# Altium PCB pure60-WKL.PcbDoc
Units mm, origin at the board's own origin, x right, y up, seen from the top; angles counter-clockwise.
Board outline 285.25 x 94.86 mm, 2 copper layers (Component Side, Bottom Layer), stack 1.571 mm thick; 141 components, 94 nets, 545 pads, 42 vias.
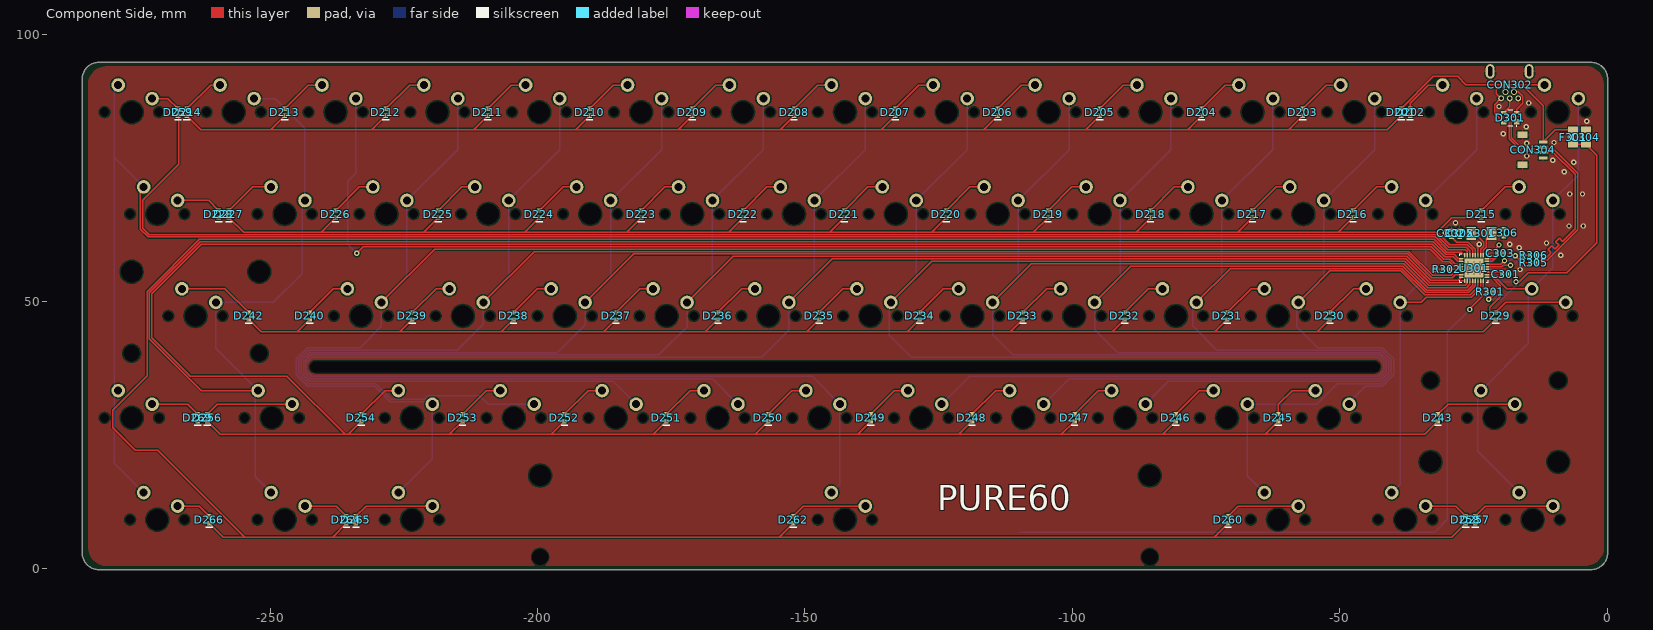
[diagram p0: Component Side view]
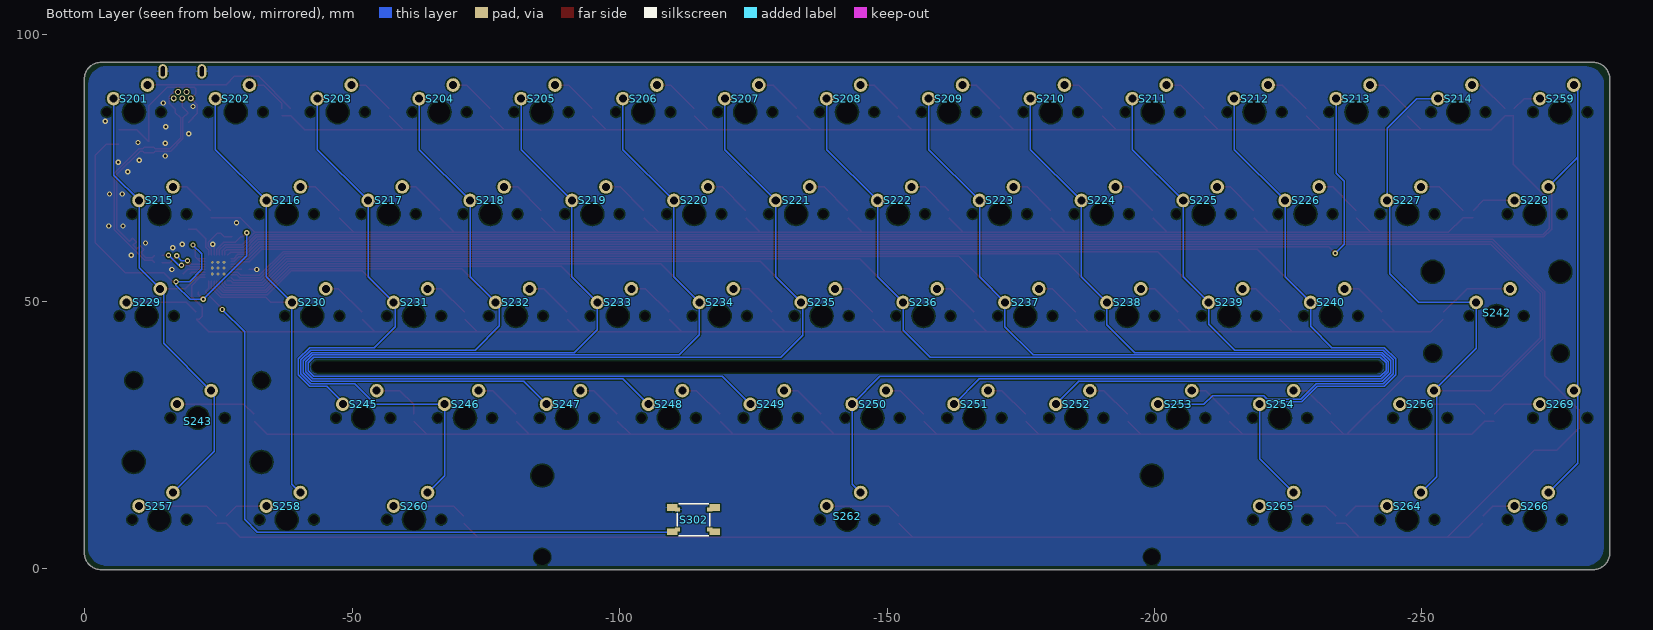
[diagram p1: Bottom Layer view, seen from below]
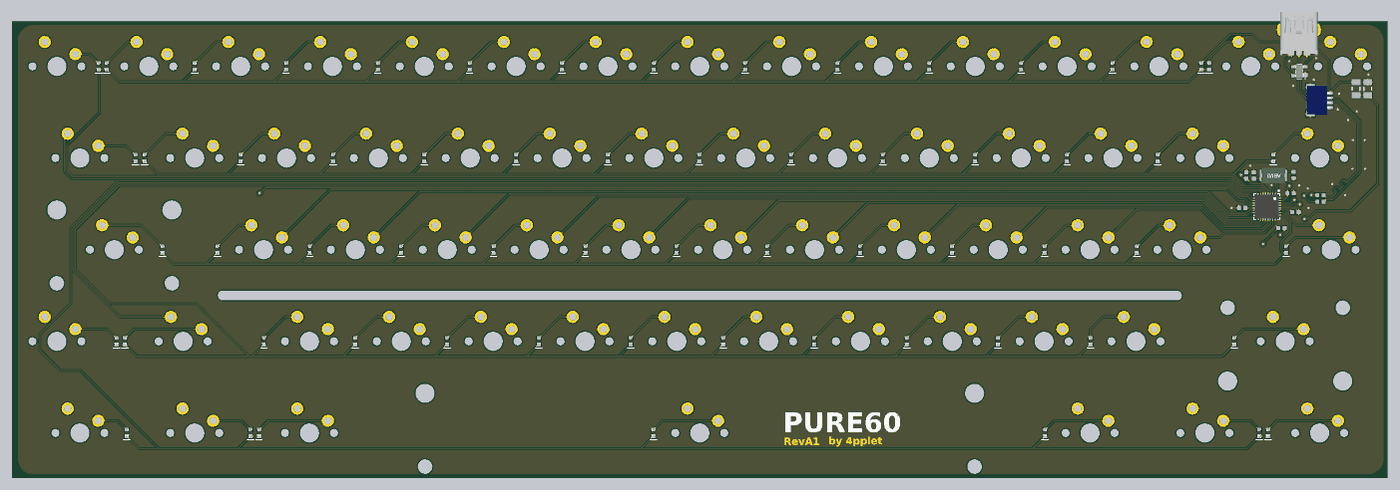
[diagram p2: 3D render of the assembled board from above, using the file's embedded part models]

## Layer stack, top to bottom
Top Solder: solder mask 0.0102, Solder Resist, Dk 3.5
Component Side: signal copper 0.0356
Dielectric 1: core 1.5, FR-4, Dk 4.2
Bottom Layer: signal copper 0.0356
Solder Side: solder mask 0.0102, Solder Resist, Dk 3.5

## Board outline
-285.127,3.01 -285.127,91.615 cw(c-282,91.615) -282,94.742 cw(c-282,94.615) -281.999,94.742 -195.49,94.742 -198.628,94.742 ccw(c-198.628,94.615) -198.629,94.742 -198.628,94.742 -3,94.742 cw(c-3,91.615) 0.127,91.615 0.127,3.01 cw(c-3,3.01) -3,-0.117 cw(c-3,0.01) -3.035,-0.112 -281.965,-0.112 cw(c-282,0.01) -282,-0.117 cw(c-282,3.01)

## Design rules (kind name [scope] priority, off if disabled: settings)
Clearance [All] p1: gap=0.2 ignorepadtopadclearanceinfootprint=FALSE except(0: Arc-Hole Track-Hole SMDPad-Hole THPad-Hole Via-Hole Fill-Hole Poly-Hole Region-Hole Text-Hole; 0.254: THPad-THPad THPad-Via THPad-Fill THPad-Poly THPad-Region THPad-Text Via-Via Via-Fill Via-Poly Via-Region Via-Text Fill-Fill Fill-Poly Fill-Region Fill-Text Poly-Poly Poly-Region Poly-Text Region-Region Region-Text Text-Text)
ComponentClearance [InComponent('No Component') And OnLayer('Component Side')] p1: gap=0.254 collisioncheckmode=3 verticalgap=0.254 showdistances=FALSE
DiffPairsRouting DiffPairsRouting_USB [InDifferentialPairClass('All Differential Pairs')] p1: maxlimit=0.254 minlimit=0.203 mostfreqgap=0.203 toplayer_minwidth=0.152 toplayer_maxwidth=0.381 toplayer_prefwidth=0.152 bottomlayer_minwidth=0.152 bottomlayer_maxwidth=0.381 bottomlayer_prefwidth=0.152 maxuncoupledlength=12.7
DiffPairsRouting [All] p2: maxlimit=0.254 minlimit=0.254 mostfreqgap=0.254 toplayer_minwidth=0.381 toplayer_maxwidth=0.381 toplayer_prefwidth=0.381 bottomlayer_minwidth=0.381 bottomlayer_maxwidth=0.381 bottomlayer_prefwidth=0.381 maxuncoupledlength=12.7
HoleSize [All] p1: absolutevalues=TRUE maxlimit=20 minlimit=0.025 maxpercent=80.000 minpercent=20.000
MatchedLengths MatchedLengths_USB_DiffPairs_1 [All] p1: tolerance=0.127 checknetsindiffpair=TRUE checkdiffpairvsdiffpair=FALSE checkxsignals=FALSE checkothers=FALSE
MatchedLengths MatchedLengths_USB_DiffPairs [All] p2: tolerance=0.127 checknetsindiffpair=TRUE checkdiffpairvsdiffpair=FALSE checkxsignals=FALSE checkothers=FALSE
PolygonConnect PolygonConnect_1 [All vs IsVia] p1: connectstyle=Direct reliefconductorwidth=0.254 reliefentries=4 polygonreliefangle="90 Angle" airgapwidth=0.254
PolygonConnect [All] p2: connectstyle=Relief reliefconductorwidth=0.254 reliefentries=4 polygonreliefangle="90 Angle" airgapwidth=0.254
RoutingVias [All] p1: holewidth=0.711 width=1.27 viastyle="Through Hole" minholewidth=0.711 minwidth=1.27 maxholewidth=0.711 maxwidth=1.27
SolderMaskExpansion [All] p1: expansion=0.102
Width [All] p1: maxlimit=0.254 minlimit=0.203 preferedwidth=0.254
27 further rules are at their usual default settings.

## Classes and differential pairs
component class Designator: C201 C202 C203 C204 C205 C206 D201 D202 D203 D204 D205 D206 D207 D208 D209 D210 D211 D212 D213 D214 D215 D216 D217 D218 D219 D220 D221 D222 D223 D224 D225 D226 D227 D228 D229 D230 D231 D232 D233 D234 D235 D236 D237 D238 D239 D240 D242 D243 D245 D246 D247 D248 D249 D250 D251 D252 D253 D254 D256 D257 D258 D259 D260 D262 D264 D265 D266 D268 D269 S201 S202 S203 S204 S205 S206 S207 S208 S209 S210 S211 S212 S213 S214 S215 S216 S217 S218 S219 S220 S221 S222 S223 S224 S225 S226 S227 S228 S229 S230 S231 S232 S233 S234 S235 S236 S237 S238 S239 S240 S242 S243 S245 S246 S247 S248 S249 S250 S251 S252 S253 S254 S256 S257 S258 S259 S260 S262 S264 S265 S266 S269
differential pair D: +D_P -D_N
differential pair D_PRE: +D_PRE_P -D_PRE_N

## Components (designator, comment, footprint, x,y, rotation, side; value= is the part's Value field where it differs from the comment)
C301 "" C0603[1608] -18.923,55.118 r180 top value=1uF
C302 "" C0603[1608] -29.083,62.738 r270 top value=0.1uF
C303 "" C0603[1608] -19.939,59.055 r180 top value=0.1uF
C304 "" C1206[3216] -3.937,80.772 r270 top value=4,7uF
C305 "" C0603[1608] -27.559,62.738 r270 top value=36pF
C306 "" C0603[1608] -19.304,62.865 r90 top value=36pF
CON302 "Molex 0565790519" "Molex 0565790519" -18.2,88 r270 top locked
CON304 "Header 5" "JST SM04B-SRSS-TB" -15.813,81.167 r270 top
D201 "Diode" D0603[1608] -38.481,85.415 r270 top
D202 "Diode" D0603[1608] -36.83,85.415 r270 top
D203 "Diode" D0603[1608] -56.896,85.415 r270 top
D204 "Diode" D0603[1608] -75.819,85.415 r270 top
D205 "Diode" D0603[1608] -94.869,85.415 r270 top
D206 "Diode" D0603[1608] -113.919,85.415 r270 top
D207 "Diode" D0603[1608] -133.096,85.415 r270 top
D208 "Diode" D0603[1608] -152.019,85.415 r270 top
D209 "Diode" D0603[1608] -171.069,85.415 r270 top
D210 "Diode" D0603[1608] -190.246,85.415 r270 top
D211 "Diode" D0603[1608] -209.296,85.415 r270 top
D212 "Diode" D0603[1608] -228.346,85.415 r270 top
D213 "Diode" D0603[1608] -247.269,85.415 r270 top
D214 "Diode" D0603[1608] -265.557,85.415 r270 top
D215 "Diode" D0603[1608] -23.495,66.365 r270 top
D216 "Diode" D0603[1608] -47.498,66.365 r270 top
D217 "Diode" D0603[1608] -66.294,66.365 r270 top
D218 "Diode" D0603[1608] -85.344,66.365 r270 top
D219 "Diode" D0603[1608] -104.521,66.365 r270 top
D220 "Diode" D0603[1608] -123.571,66.365 r270 top
D221 "Diode" D0603[1608] -142.621,66.365 r270 top
D222 "Diode" D0603[1608] -161.544,66.365 r270 top
D223 "Diode" D0603[1608] -180.594,66.365 r270 top
D224 "Diode" D0603[1608] -199.644,66.365 r270 top
D225 "Diode" D0603[1608] -218.567,66.365 r270 top
D226 "Diode" D0603[1608] -237.744,66.365 r270 top
D227 "Diode" D0603[1608] -257.683,66.365 r270 top
D228 "Diode" D0603[1608] -259.588,66.365 r270 top
D229 "Diode" D0603[1608] -20.828,47.315 r270 top
D230 "Diode" D0603[1608] -51.816,47.315 r270 top
D231 "Diode" D0603[1608] -70.993,47.315 r270 top
D232 "Diode" D0603[1608] -90.17,47.315 r270 top
D233 "Diode" D0603[1608] -109.22,47.315 r270 top
D234 "Diode" D0603[1608] -128.524,47.315 r270 top
D235 "Diode" D0603[1608] -147.32,47.315 r270 top
D236 "Diode" D0603[1608] -166.243,47.315 r270 top
D237 "Diode" D0603[1608] -185.293,47.315 r270 top
D238 "Diode" D0603[1608] -204.47,47.315 r270 top
D239 "Diode" D0603[1608] -223.393,47.315 r270 top
D240 "Diode" D0603[1608] -242.57,47.315 r270 top
D242 "Diode" D0603[1608] -254,47.315 r270 top
D243 "Diode" D0603[1608] -31.623,28.265 r270 top
D245 "Diode" D0603[1608] -61.468,28.265 r270 top
D246 "Diode" D0603[1608] -80.645,28.265 r270 top
D247 "Diode" D0603[1608] -99.568,28.265 r270 top
D248 "Diode" D0603[1608] -118.745,28.265 r270 top
D249 "Diode" D0603[1608] -137.668,28.265 r270 top
D250 "Diode" D0603[1608] -156.845,28.265 r270 top
D251 "Diode" D0603[1608] -175.895,28.265 r270 top
D252 "Diode" D0603[1608] -194.945,28.265 r270 top
D253 "Diode" D0603[1608] -213.995,28.265 r270 top
D254 "Diode" D0603[1608] -232.918,28.265 r270 top
D256 "Diode" D0603[1608] -261.747,28.265 r270 top
D257 "Diode" D0603[1608] -24.638,9.215 r270 top
D258 "Diode" D0603[1608] -26.416,9.215 r270 top
D259 "Diode" D0603[1608] -267.208,85.415 r270 top
D260 "Diode" D0603[1608] -70.866,9.215 r270 top
D262 "Diode" D0603[1608] -152.146,9.215 r270 top
D264 "Diode" D0603[1608] -235.712,9.215 r270 top
D265 "Diode" D0603[1608] -233.934,9.215 r270 top
D266 "Diode" D0603[1608] -261.366,9.215 r270 top
D269 "Diode" D0603[1608] -263.525,28.265 r270 top
D301 "PRTR5V0U2X" SOT190P237X120-4N -18.091,84.394 r180 top
F301 "Fuse Thermal" C1206[3216] -6.35,80.772 r90 top
R301 "Res1" R0603[1608] -21.829,51.816 r180 top value=10K
R302 "Res1" R0603[1608] -29.972,56.007 r180 top value=10K
R305 "Res1" R0603[1608] -13.716,57.277 r0 top value=22
R306 "Res1" R0603[1608] -13.731,58.674 r0 top value=22
S201 "MX" "MX-SWITCH - SWITCHED POL" -9.15,85.415 r180 bottom locked
S202 "MX" "MX-switch - switched pol" -28.2,85.415 r180 bottom locked
S203 "MX" "MX-SWITCH - SWITCHED POL" -47.25,85.415 r180 bottom locked
S204 "MX" "MX-switch - switched pol" -66.3,85.415 r180 bottom locked
S205 "MX" "MX-switch - switched pol" -85.35,85.415 r180 bottom locked
S206 "MX" "MX-switch - switched pol" -104.4,85.415 r180 bottom locked
S207 "MX" "MX-switch - switched pol" -123.45,85.415 r180 bottom locked
S208 "MX" "MX-switch - switched pol" -142.5,85.415 r180 bottom locked
S209 "MX" "MX-switch - switched pol" -161.55,85.415 r180 bottom locked
S210 "MX" "MX-switch - switched pol" -180.6,85.415 r180 bottom locked
S211 "MX" "MX-switch - switched pol" -199.65,85.415 r180 bottom locked
S212 "MX" "MX-switch - switched pol" -218.7,85.415 r180 bottom locked
S213 "MX" "MX-switch - switched pol" -237.75,85.415 r180 bottom locked
S214 "MX" "MX-switch - switched pol" -256.8,85.415 r180 bottom locked
S215 "MX" "MX-SWITCH - 1.5U - SWITCHED POL" -13.912,66.365 r180 bottom locked
S216 "MX" "MX-SWITCH - SWITCHED POL" -37.725,66.365 r180 bottom locked
S217 "MX" "MX-SWITCH - SWITCHED POL" -56.775,66.365 r180 bottom locked
S218 "MX" "MX-SWITCH - SWITCHED POL" -75.825,66.365 r180 bottom locked
S219 "MX" "MX-SWITCH - SWITCHED POL" -94.875,66.365 r180 bottom locked
S220 "MX" "MX-SWITCH - SWITCHED POL" -113.925,66.365 r180 bottom locked
S221 "MX" "MX-SWITCH - SWITCHED POL" -132.975,66.365 r180 bottom locked
S222 "MX" "MX-SWITCH - SWITCHED POL" -152.025,66.365 r180 bottom locked
S223 "MX" "MX-SWITCH - SWITCHED POL" -171.075,66.365 r180 bottom locked
S224 "MX" "MX-SWITCH - SWITCHED POL" -190.125,66.365 r180 bottom locked
S225 "MX" "MX-SWITCH - SWITCHED POL" -209.175,66.365 r180 bottom locked
S226 "MX" "MX-SWITCH - SWITCHED POL" -228.225,66.365 r180 bottom locked
S227 "MX" "MX-SWITCH - SWITCHED POL" -247.275,66.365 r180 bottom locked
S228 "MX" "MX-SWITCH - 1.5U" -271.087,66.365 r180 bottom locked
S229 "MX" "MX-switch - CAPS - stepped" -16.294,47.315 r180 bottom locked
S230 "MX" "MX-SWITCH - SWITCHED POL" -42.487,47.315 r180 bottom locked
S231 "MX" "MX-SWITCH - SWITCHED POL" -61.537,47.315 r180 bottom locked
S232 "MX" "MX-SWITCH - SWITCHED POL" -80.587,47.315 r180 bottom locked
S233 "MX" "MX-SWITCH - SWITCHED POL" -99.637,47.315 r180 bottom locked
S234 "MX" "MX-SWITCH - SWITCHED POL" -118.687,47.315 r180 bottom locked
S235 "MX" "MX-SWITCH - SWITCHED POL" -137.737,47.315 r180 bottom locked
S236 "MX" "MX-SWITCH - SWITCHED POL" -156.787,47.315 r180 bottom locked
S237 "MX" "MX-SWITCH - SWITCHED POL" -175.837,47.315 r180 bottom locked
S238 "MX" "MX-SWITCH - SWITCHED POL" -194.887,47.315 r180 bottom locked
S239 "MX" "MX-SWITCH - SWITCHED POL" -213.937,47.315 r180 bottom locked
S240 "MX" "MX-SWITCH - SWITCHED POL" -232.987,47.315 r180 bottom locked
S242 "MX" "MX-switch - Enter_ANSI" -263.95,47.315 r180 bottom locked
S243 "MX" "MX-switch - 2.25U" -21.056,28.265 r180 bottom locked
S245 "MX" "MX-SWITCH - SWITCHED POL" -52.012,28.265 r180 bottom locked
S246 "MX" "MX-SWITCH - SWITCHED POL" -71.062,28.265 r180 bottom locked
S247 "MX" "MX-SWITCH - SWITCHED POL" -90.112,28.265 r180 bottom locked
S248 "MX" "MX-SWITCH - SWITCHED POL" -109.162,28.265 r180 bottom locked
S249 "MX" "MX-SWITCH - SWITCHED POL" -128.212,28.265 r180 bottom locked
S250 "MX" "MX-SWITCH - SWITCHED POL" -147.262,28.265 r180 bottom locked
S251 "MX" "MX-SWITCH - SWITCHED POL" -166.312,28.265 r180 bottom locked
S252 "MX" "MX-SWITCH - SWITCHED POL" -185.362,28.265 r180 bottom locked
S253 "MX" "MX-SWITCH - SWITCHED POL" -204.412,28.265 r180 bottom locked
S254 "MX" "MX-SWITCH - SWITCHED POL" -223.462,28.265 r180 bottom locked
S256 "MX" "MX-switch - 1.75" -249.682,28.265 r180 bottom locked
S257 "MX" "MX-SWITCH - 1.5U" -13.912,9.215 r180 bottom locked
S258 "MX" MX-switch -37.719,9.215 r180 bottom
S259 "MX" MX-switch -275.85,85.415 r180 bottom locked
S260 "MX" "MX-SWITCH - 1.5U" -61.537,9.215 r180 bottom locked
S262 "MX" "MX-switch - 7u space" -142.499,9.215 r0 bottom locked
S264 "MX" MX-switch -247.269,9.215 r180 bottom
S265 "MX" "MX-SWITCH - 1.5U" -223.462,9.215 r180 bottom locked
S266 "MX" "MX-SWITCH - 1.5U" -271.087,9.215 r180 bottom locked
S269 "MX" MX-SWITCH -275.85,28.265 r180 bottom locked
S302 "SW-PB" "COMBO SWITCH" -113.792,9.215 r180 bottom
U301 "ATMEGA32U2" ATMEGA32U2-QFN -24.879,56.273 r270 top
X301 "XTAL" "CTS 445-series crystal" -23.495,62.738 r180 top

## Footprints (in the part's own frame and the unit in brackets; to place one, negate y for a bottom-side part, rotate by r counter-clockwise, add the part's x,y. Pads: shape width x height; smd on the part's side, far side on the other; paste and mask are expansions set on the pad)
ATMEGA32U2-QFN [mm] "QFN, 32-Leads, Body 5,00x5,00mm, Pitch 0,50mm, Thermal Pad 3,60x3,60mm, IPC Medium Density"
  oval 0.85x0.25 smd: 1(-2.4,1.75) 2(-2.4,1.25) 3(-2.4,0.75) 4(-2.4,0.25) 5(-2.4,-0.25) 6(-2.4,-0.75) 7(-2.4,-1.25) 8(-2.4,-1.75) 17(2.4,-1.75) 18(2.4,-1.25) 19(2.4,-0.75) 20(2.4,-0.25) 21(2.4,0.25) 22(2.4,0.75) 23(2.4,1.25) 24(2.4,1.75)
  oval 0.25x0.85 smd: 9(-1.75,-2.4) 10(-1.25,-2.4) 11(-0.75,-2.4) 12(-0.25,-2.4) 13(0.25,-2.4) 14(0.75,-2.4) 15(1.25,-2.4) 16(1.75,-2.4) 25(1.75,2.4) 26(1.25,2.4) 27(0.75,2.4) 28(0.25,2.4) 29(-0.25,2.4) 30(-0.75,2.4) 31(-1.25,2.4) 32(-1.75,2.4)
  rect 3.6x3.6 smd: 28(0,0)
  silkscreen extent -3.42,-2.65 2.65,2.65, body extent -2.51,-2.51 2.51,2.51, height 1
C0603[1608] [mm] "Chip Resistor, 2-Leads, Body 1,57x0,80mm, IPC Medium Density"
  rect 0.8x0.85 smd: 1(-0.65,0) 2(0.65,0)
  body extent -0.83,-0.43 0.82,0.43, height 0.5
C1206[3216] [mm]
  rect 1.2x1.8 smd: 1(-1.35,0) 2(1.35,0)
  silkscreen extent -0.35,-0.8 0.35,0.8, body extent -1.6,-0.9 1.6,0.9, height 1.2
"COMBO SWITCH" [mm] "Wurth Electronics Inc."
  rect 2x1.3 smd: 1(-3.975,2.25) 2(-3.975,-2.25) ""(3.975,-2.25) ""(3.975,2.25)
  rect 1x0.75 smd: 1(-3,1.875) 2(-3,-1.875) ""(3,-1.875) ""(3,1.875)
  round 1 on Mech16: ""(0,0)
  silkscreen extent -3,-3 3,3, body extent -4.5,-3.1 4.5,3.1, height 5
"CTS 445-series crystal" [mm]
  rect 1.8x2.4 smd: 1(-1.9,0) 2(1.9,0)
  body extent -2.5,-1.6 2.5,1.6, height 1.3
D0603[1608] [mm] "Chip Resistor, 2-Leads, Body 1,57x0,80mm, IPC Medium Density"
  rect 0.8x0.85 smd: 1(-0.65,0) 2(0.65,0)
  silkscreen extent 1.4,-0.63 1.4,0.64, body extent -0.8,-0.45 0.8,0.45, height 0.59
"JST SM04B-SRSS-TB" [mm]
  rect 0.6x1.55 smd: 1(1.3,3.875) 2(2.3,3.875) 3(3.3,3.875) 4(4.3,3.875)
  rect 1.2x1.8 smd: 5(0,0) 5(5.6,0)
  body extent -0.21,-0.76 5.79,4.19, height 3.25
"Molex 0565790519" [mm] "CONN RCPT USB2.0 MINI AB 5P R/A"
  round 1.1 hole 0.7: dn(-1.2,0.8) dp(0,0) gnd(0,1.6) id(-1.2,-0.8) vbus(0,-1.6)
  oval 2.7x1.7 hole 0.7 slot 1.9 at 0 deg: shield(-5.05,3.65) shield(-5.05,-3.65)
  body extent -8.75,-3.85 0.25,3.85, height 3.95
MX-switch [mm]
  round 2.54 hole 1.499 mask+0.102: 1(-3.81,2.54) 2(2.54,5.08)
  round 1 hole 1.702 unplated: ""(-5.08,0) ""(5.08,0)
  round 1 hole 3.988 unplated: ""(0,0)
MX-SWITCH [mm]
  round 2.54 hole 1.499 mask+0.102: 1(-3.81,2.54) 2(2.54,5.08)
  round 1 hole 1.702 unplated: ""(-5.08,0) ""(5.08,0)
  round 1 hole 3.988 unplated: ""(0,0)
"MX-SWITCH - 1.5U" [mm]
  round 2.54 hole 1.499 mask+0.102: 1(-3.81,2.54) 2(2.54,5.08)
  round 1 hole 1.702 unplated: ""(-5.08,0) ""(5.08,0)
  round 1 hole 3.988 unplated: ""(0,0)
  round 1 on Mech14: ""(0,0)
"MX-SWITCH - 1.5U - SWITCHED POL" [mm]
  round 2.54 hole 1.499 mask+0.102: 1(2.54,5.08) 2(-3.81,2.54)
  round 1 hole 1.702 unplated: ""(-5.08,0) ""(5.08,0)
  round 1 hole 3.988 unplated: ""(0,0)
  round 1 on Mech14: ""(0,0)
"MX-switch - 1.75" [mm]
  round 2.54 hole 1.499 mask+0.102: 1(-3.81,2.54) 2(2.54,5.08)
  round 1 hole 1.702 unplated: ""(-5.08,0) ""(5.08,0)
  round 1 hole 3.988 unplated: ""(0,0)
  round 1 on Mech14: ""(0,0)
"MX-switch - 2.25U" [mil]
  round 100 hole 59 mask+4: 1(-150,100) 2(100,200)
  round 60 hole 157.01 unplated: ""(-470,-325) ""(470,-325)
  round 60 hole 120 unplated: ""(-470,275) ""(470,275)
  round 39.37 hole 67.01 unplated: ""(-200,0) ""(200,0)
  round 39.37 hole 157.01 unplated: ""(0,0)
  round 39.37 on Mech14: ""(0,0)
"MX-switch - 7u space" [mm]
  round 2.54 hole 1.499 mask+0.102: 1(3.81,-2.54) 2(-2.54,-5.08)
  round 1.524 hole 3.988 unplated: ""(-57,-8.255) ""(57,-8.255)
  round 1.524 hole 3.048 unplated: ""(-57,6.985) ""(57,6.985)
  round 1 hole 1.702 unplated: ""(-5.08,0) ""(5.08,0)
  round 1 hole 3.988 unplated: ""(0,0)
  round 1 on Mech14: ""(0,0)
"MX-switch - CAPS - stepped" [mm]
  round 2.54 hole 1.499 mask+0.102: 1(-8.572,2.54) 2(-2.222,5.08)
  round 1 hole 1.702 unplated: ""(-9.842,0) ""(0.318,0)
  round 1 hole 3.988 unplated: ""(-4.763,0)
  round 1 on Mech14: ""(-4.763,0) ""(0,0)
"MX-switch - Enter_ANSI" [mil]
  round 100 hole 59 mask+4: 1(100,200) 2(-150,100)
  round 60 hole 120 unplated: ""(-470,-275) ""(470,-275)
  round 60 hole 157.01 unplated: ""(-470,325) ""(470,325)
  round 39.37 on Mech14: ""(-468.75,0) ""(-468.75,0) ""(0,0) ""(0,0)
  round 39.37 hole 67.01 unplated: ""(-200,0) ""(200,0)
  round 39.37 hole 157.01 unplated: ""(0,0)
"MX-SWITCH - SWITCHED POL" [mm]
  round 2.54 hole 1.499 mask+0.102: 1(2.54,5.08) 2(-3.81,2.54)
  round 1 hole 1.702 unplated: ""(-5.08,0) ""(5.08,0)
  round 1 hole 3.988 unplated: ""(0,0)
"MX-switch - switched pol" [mm]
  round 2.54 hole 1.499 mask+0.102: 1(2.54,5.08) 2(-3.81,2.54)
  round 1 hole 1.702 unplated: ""(-5.08,0) ""(5.08,0)
  round 1 hole 3.988 unplated: ""(0,0)
R0603[1608] [mm] "Chip Resistor, 2-Leads, Body 1,57x0,80mm, IPC Medium Density"
  rect 0.8x0.85 smd: 1(-0.65,0) 2(0.65,0)
  body extent -0.83,-0.43 0.82,0.43, height 0.5
SOT190P237X120-4N [mm] "SOT143, 4-Leads, Body 3,00x2,37mm, Pitch 1,90mm, IPC Medium Density"
  rect 1x1 smd: 1(-1.2,0.75)
  rect 1x0.6 smd: 2(-1.2,-0.95) 3(1.2,-0.95) 4(1.2,0.95)
  silkscreen extent -1.25,-1.5 0.7,1.6, body extent -1.25,-1.5 1.24,1.5, height 1.09

## Part data
C301: library part Cap, "Capacitor", LCSC MFG="Samsung Electro-Mechanics", LCSCPN=C15849, MFG=KEMET, MFGPN=C0603C104M5RACTU, MRF.Part=CL10A105KB8NNNC, Version="0603 imperial"
C302 C303: library part Cap, "Capacitor", LCSC MFG=YAGEO, LCSCPN=C14663, MFG=KEMET, MFGPN=C0603C104M5RACTU, MRF.Part=CC0603KRX7R9BB104, Version="0603 imperial"
C304: library part Cap, "Capacitor", LCSC MFG="Guangdong Fenghua Advanced Tech", LCSCPN=C29823, MFG=KEMET, MFGPN=C0603C104M5RACTU, MRF.Part=1206B475K500NT, Version="1206 imperial"
C305 C306: library part Cap, "Capacitor", LCSC MFG="Samsung Electro-Mechanics", LCSCPN=C159790, MFG=KEMET, MFGPN=C0603C104M5RACTU, MRF.Part=CL10C360JB8NNNC, Version="0603 imperial"
CON304: "JST for USB daughter board", LCSC MFG="JST Sales America", LCSCPN=C160404, MFG="JST Sales America Inc.", MFGPN=SM04B-SRSS-TB(LF)(SN), MRF.Part=SM04B-SRSS-TB(LF)(SN)
D201 D202 D203 D204 D205 D206 D207 D208 D209 D210 D211 D212 D213 D214 D215 D216 D217 D218 D219 D220 D221 D222 D223 D224 D225 D226 D227 D228 D229 D230 D231 D232 D233 D234 D235 D236 D237 D238 D239 D240 D242 D243 D245 D246 D247 D248 D249 D250 D251 D252 D253 D254 D256 D257 D258 D259 D260 D262 D264 D265 D266 D269: "Default Diode", LCSC MFG="Brightking Elec (TAIWAN)", LCSCPN=C109002, MFG="Bourns Inc.", MFGPN=CD0603-B0340R, MRF.Part=CD4148WTP, Version="0603 imperial"
D301: LCSC MFG="Brightking Elec (TAIWAN)", LCSCPN=C78442, MFG="Nexperia USA Inc.", MFGPN=PRTR5V0U2X,215, MRF.Part=UET14A05L03
F301: "Thermal Fuse", LCSC MFG="Shenzhen JDT Fuse", LCSCPN=C135338, MFG="Bel Fuse Inc.", MFGPN=0ZCJ0050FF2G, MRF.Part=ASMD1206-050
R301 R302: "Resistor", LCSC MFG="Uniroyal Elec", LCSCPN=C25804, MFG="Panasonic Electronic Components", MFGPN=ERJ-3EKF5101V, MRF.Part=0603WAF1002T5E, Version="0603 imperial"
R305 R306: "Resistor", LCSC MFG="Uniroyal Elec", LCSCPN=C23345, MFG="Panasonic Electronic Components", MFGPN=ERJ-3EKF5101V, MRF.Part=0603WAF220JT5E, Version="0603 imperial"
S201 S202 S203 S204 S205 S206 S207 S208 S209 S210 S211 S212 S213 S214 S216 S217 S218 S219 S220 S221 S222 S223 S224 S225 S226 S227 S228 S229 S230 S231 S232 S233 S234 S235 S236 S237 S238 S239 S240 S242 S243 S245 S246 S247 S248 S249 S250 S251 S252 S253 S254 S256 S257 S258 S259 S260 S262 S264 S265 S266 S269: library part SW-PB, "Switch"
S215: library part SW-PB, "TAB"
S302: "Switch", LCSC MFG="XKB Enterprise", LCSCPN=C318888, MFG=C&K, MFGPN="PTS645SM43SMTR92 LFS", MRF.Part=TS-1187A-C-D-B
U301: LCSC MFG="Microchip Tech", LCSCPN=C57345, MFG="Microchip Technology", MFGPN=ATMEGA32U2-AUR, MRF.Part=ATMEGA32U2-MU
X301: "Crystal Oscillator", LCSC MFG="Yangxing Tech", LCSCPN=C112572, MRF.Part=X503216MSB2GI

## Free pads (board coordinates)
  round 0 hole 2 slot 200 at 0 deg: ""(-142.5,37.79)

## Via types
v1: diameter 1, hole 0.5, Component Side to Bottom Layer, tented both sides, 33 vias
v2: diameter 0.5, hole 0.2, Component Side to Bottom Layer, tented bottom, 9 vias

## Nets (pads, with @x,y where several pads share a name; then routed paths per layer and width w, separated by ;. In a path a pad name is that pad's centre, name@x,y a point inside that pad or via, vN(x,y) a via of type N, cw(c..) or ccw(c..) an arc to the next point about the centre after c; other vN are vias at no path point)
col1: S201.2 S215.2 S229.2 S243.2 S257.2 U301.26 | length 94.1
  Component Side w0.254: U301.26 -21.361,55.023 -18.733,52.395 S229.2
  Bottom Layer w0.254: S257.2 -24.13,21.973 -24.13,32.811 S243.2 -23.551,33.345 -14.732,42.164 -14.732,51.734 S229.2 -10.102,56.364 S215.2 -5.34,73.668 S201.2
col2: S202.2 S216.2 S230.2 S258.2 U301.23 | length 97.7
  Component Side w0.254: S230.2 -34.727,49.855 -33.785,50.797 -25.396,50.797 -23.629,52.564 U301.23
  Bottom Layer w0.254: S258.2 -38.677,15.877 S230.2 -33.915,54.618 S216.2 -24.39,78.43 S202.2
col3: S203.2 S217.2 S231.2 S245.2 U301.22 | length 122.8
  Component Side w0.254: S231.2 -55.894,51.689 -55.88,51.689 -51.841,55.728 -38.541,55.728 -34.064,51.251 -25.584,51.251 -24.129,52.706 U301.22
  Bottom Layer w0.254: S245.2 -48.202,31.211 -45.22,34.193 -42.01,34.193 -39.903,36.3 -39.903,39.28 -42.01,41.387 -54.087,41.387 -58.039,45.339 -58.039,49.544 S231.2 -52.965,54.618 S217.2 -43.44,78.43 S203.2
col4: S204.2 S218.2 S232.2 S246.2 S260.2 U301.21 | length 196.2
  Component Side w0.254: S232.2 -70.45,56.182 -38.353,56.182 -33.876,51.705 -25.878,51.705 -24.629,52.954 U301.21
  Bottom Layer w0.254: S260.2 -67.252,17.47 S246.2 -54.285,30.805 -50.443,34.647 -42.198,34.647 -40.357,36.488 -40.357,39.092 -42.198,40.933 -72.937,40.933 -77.47,45.466 -77.47,49.163 S232.2 -72.015,54.618 S218.2 -62.49,78.43 S204.2
col5: S205.2 S219.2 S233.2 S247.2 U301.20 | length 233.2
  Component Side w0.254: S233.2 -89.046,56.636 -38.165,56.636 -33.688,52.159 -26.066,52.159 -25.129,53.096 U301.20
  Bottom Layer w0.254: S247.2 -82.006,35.101 -42.386,35.101 -40.811,36.676 -40.811,38.904 -42.386,40.479 -91.532,40.479 -95.827,44.775 S233.2 -91.065,54.618 S219.2 -81.54,78.43 S205.2
col6: S206.2 S220.2 S234.2 S248.2 U301.19 | length 289.3
  Component Side w0.254: S234.2 -107.642,57.09 -37.977,57.09 -33.5,52.613 -26.254,52.613 -25.629,53.238 U301.19
  Bottom Layer w0.254: S248.2 -100.602,35.555 -42.574,35.555 -41.265,36.864 -41.265,38.716 -42.574,40.025 -111.144,40.025 -114.877,43.759 S234.2 -110.115,54.618 S220.2 -100.59,78.43 S206.2
col7: S207.2 S221.2 S235.2 S249.2 U301.18 | length 345.1
  Component Side w0.254: S235.2 -126.238,57.544 -37.789,57.544 -33.312,53.067 -26.496,53.067 -26.129,53.434 U301.18
  Bottom Layer w0.254: S249.2 -119.198,36.009 -42.762,36.009 -41.719,37.052 -41.719,38.528 -42.762,39.571 -130.122,39.571 -134.239,43.688 -134.239,49.544 S235.2 -129.165,54.618 S221.2 -119.64,78.43 S207.2
col8: S208.2 S222.2 S236.2 S250.2 S262.2 U301.17 | length 394.9
  Component Side w0.254: S236.2 -144.834,57.998 -37.601,57.998 -33.124,53.521 -27.639,53.521 -27.287,53.873 U301.17
  Bottom Layer w0.254: S262.2 -143.452,15.882 S250.2 -148.656,36.009 -242.238,36.009 -243.281,37.052 -243.281,38.528 -242.238,39.571 -158.041,39.571 -152.977,44.635 S236.2 -148.215,54.618 S222.2 -138.69,78.43 S208.2
col9: S209.2 S223.2 S237.2 S251.2 U301.16 | length 359
  Component Side w0.254: S237.2 -163.43,58.452 -37.413,58.452 -32.936,53.975 -27.827,53.975 U301.16
  Bottom Layer w0.254: S251.2 -167.252,35.555 -242.426,35.555 -243.735,36.864 -243.735,38.716 -242.426,40.025 -177.272,40.025 -172.027,45.27 S237.2 -167.265,54.618 S223.2 -157.74,78.43 S209.2
col10: S210.2 S224.2 S238.2 S252.2 U301.15 | length 341.1
  Component Side w0.254: S238.2 -182.026,58.906 -37.225,58.906 -32.747,54.429 -28.971,54.429 -28.377,55.023 U301.15
  Bottom Layer w0.254: S252.2 -185.848,35.101 -242.614,35.101 -244.189,36.676 -244.189,38.904 -242.614,40.479 -196.249,40.479 -191.077,45.651 S238.2 -186.315,54.618 S224.2 -176.79,78.43 S210.2
col11: S211.2 S225.2 S239.2 S253.2 U301.14 | length 323.8
  Component Side w0.254: S239.2 -200.622,59.36 -37.036,59.36 -32.559,54.883 -29.159,54.883 -28.519,55.523 U301.14
  Bottom Layer w0.254: S253.2 -209.24,30.805 -210.837,32.402 -220.455,32.402 -221.109,31.748 -227.314,31.748 -230.213,34.647 -242.802,34.647 -244.643,36.488 -244.643,39.092 -242.802,40.933 -214.972,40.933 -210.127,45.778 S239.2 -205.365,54.618 S225.2 -195.84,78.43 S211.2
col12: S212.2 S226.2 S240.2 S254.2 S265.2 U301.12 | length 324.2
  Component Side w0.254: S240.2 -219.218,59.814 -33.066,59.814 -30.707,57.455 -29.483,57.455 -28.551,56.523 U301.12
  Bottom Layer w0.254: S265.2 -219.652,20.645 S254.2 -220.141,31.294 -227.502,31.294 -230.401,34.193 -242.99,34.193 -245.097,36.3 -245.097,39.28 -242.99,41.387 -238.648,41.387 -238.633,41.402 -233.172,41.402 -229.177,45.397 S240.2 -224.415,54.618 S226.2 -214.89,78.43 S212.2
col13: S213.2 U301.11 | length 238.6
  Component Side w0.254: v1(-233.807,59.055) -232.594,60.268 -32.878,60.268 -30.519,57.909 -29.295,57.909 -28.409,57.023 U301.11
  Bottom Layer w0.254: S213.2 -233.94,74.035 -235.458,72.517 -235.458,60.706 v1(-233.807,59.055)
col14: S214.2 S227.2 S242.2 S256.2 S264.2 U301.9 | length 381.3
  Component Side w0.254: S256.2 -262.834,33.345 -272.542,43.053 -272.542,51.689 -263.055,61.176 -32.502,61.176 -30.143,58.817 -28.584,58.817 -27.79,58.023 U301.9
  Bottom Layer w0.254: S214.2 -248.991,87.955 -243.465,82.429 S227.2 -243.967,68.403 -243.967,55.245 -249.357,49.855 S242.2 -260.14,41.263 S256.2 -252.73,32.837 -252.73,17.216 S264.2
col15: S228.2 S259.2 S266.2 S269.2 U301.7 | length 346
  Component Side w0.254: S228.2 -274.266,70.807 -274.266,63.566 -272.784,62.084 -32.126,62.084 -29.767,59.725 -26.472,59.725 -26.129,59.382 U301.7
  Bottom Layer w0.254: S259.2 -279.146,89.739 -279.146,76.964 ; S266.2 -279.146,19.814 -279.146,32.589 S269.2 -279.146,34.101 -279.146,76.964 ; S228.2 -279.146,76.964
D_N: CON302.dn CON304.2 D301.2 R305.2 | length 46.7
  Component Side w0.254: CON302.dn -16.56,89.2 -15.723,88.363 -15.723,87.123 -16.891,85.955 D301.2 -17.862,84.373 -17.862,80.6 -15.858,78.596 -13.111,78.596 -12.84,78.867 CON304.2 -11.036,78.867 -10.765,78.596 -10.098,78.596 -5.512,74.01 -5.512,63.438 -11.203,57.747 -12.596,57.747 R305.2
D_P: CON302.dp CON304.3 D301.3 R306.2 | length 46.7
  Component Side w0.254: CON302.dp -18.2,86.435 D301.3 -18.32,84.373 -18.32,80.411 -16.047,78.138 -13.111,78.138 -12.84,77.867 CON304.3 -11.036,77.867 -10.765,78.138 -10.287,78.138 -5.969,73.82 -5.969,63.627 -7.938,61.658 -8.275,61.321 -8.346,61.321 -8.875,61.851 -8.946,61.851 -9.585,61.212 -9.585,61.141 -9.056,60.611 -9.056,60.54 -9.695,59.901 -9.766,59.901 -10.295,60.431 -10.366,60.431 -11.005,59.792 -11.005,59.721 -10.476,59.191 -10.476,59.12 -10.795,58.801 -11.392,58.204 -12.611,58.204 R306.2
D_PRE_N: R305.1 U301.30 | length 9.3
  Component Side w0.254: U301.30 -21.927,57.023 -21.906,57.002 -19.833,57.002 v1(-19.177,57.658) ; v1(-17.145,58.547) -15.875,57.277 R305.1
  Bottom Layer w0.254: v1(-19.177,57.658) -18.034,57.658 v1(-17.145,58.547)
D_PRE_P: R306.1 U301.29 | length 8.8
  Component Side w0.254: U301.29 -21.927,56.523 -21.906,56.544 -19.644,56.544 -19.419,56.769 v1(-18.034,56.769) ; v1@-15.367,58.801 -15.24,58.674 R306.1
  Bottom Layer w0.254: v1(-18.034,56.769) -17.526,56.769 v1(-15.621,58.674)
GND: C301.1 C302.1 C303.1 C304.1 C305.1 C306.1 CON302.gnd CON302.shield CON304.4 CON304.5 D301.1 R302.2 S302.1 U301.3 U301.28 | length 8.2
  Component Side w0.254: v1(-32.131,56.007) R302.2 ; U301.3 -24.129,60.453 v1(-23.876,60.706) ; U301.28@-22.479,56.023 -19.178,56.023 C301.1
  other v1: -16.256,56.007 -8.636,58.674 -16.383,60.071 -18.161,60.706 -11.303,60.96 -7.112,64.135 -4.445,64.135 -28.321,64.77 -6.985,70.104 -4.572,70.104 -8.001,74.295 -6.223,76.073 -10.16,76.454 -14.986,77.216 -14.986,79.629 -9.906,79.756 -19.431,81.407 -15.113,82.677 -3.81,83.693 -20.193,86.487 -14.605,87.122
  other v2: -25.979,55.173 -24.879,55.173 -23.779,55.173 -25.979,56.273 -24.879,56.273 -23.779,56.273 -25.979,57.373 -24.879,57.373 -23.779,57.373
NetC301_2: C301.2 U301.27 | length 3.1
  Component Side w0.254: U301.27 -19.978,55.523 C301.2
NetC305_2: C305.2 U301.2 X301.2 | length 8.1
  Component Side w0.254: C305.2 -26.045,62.088 X301.2 -24.738,62.738 -23.049,61.049 -23.049,60.363 -23.629,59.783 U301.2
NetC306_2: C306.2 U301.1 X301.1 | length 7.3
  Component Side w0.254: U301.1 -23.129,59.641 -22.595,60.175 -22.595,61.738 X301.1 -20.818,63.515 C306.2
NetD201_1: D201.1 S201.1 | length 29.9
  Component Side w0.254: D201.1 -32.454,92.092 -27.957,92.092 -26.396,90.531 -11.726,90.531 S201.1
NetD202_1: D202.1 S202.1 | length 8.5
  Component Side w0.254: D202.1 -36.83,87.074 -33.409,90.495 S202.1
NetD203_1: D203.1 S203.1 | length 8.9
  Component Side w0.254: D203.1 -52.466,90.495 S203.1
NetD204_1: D204.1 S204.1 | length 8.8
  Component Side w0.254: D204.1 -71.389,90.495 S204.1
NetD205_1: D205.1 S205.1 | length 8.8
  Component Side w0.254: D205.1 -90.439,90.495 S205.1
NetD206_1: D206.1 S206.1 | length 8.8
  Component Side w0.254: D206.1 -109.489,90.495 S206.1
NetD207_1: D207.1 S207.1 | length 8.9
  Component Side w0.254: D207.1 -128.666,90.495 S207.1
NetD208_1: D208.1 S208.1 | length 8.8
  Component Side w0.254: D208.1 -147.589,90.495 S208.1
NetD209_1: D209.1 S209.1 | length 8.8
  Component Side w0.254: D209.1 -166.639,90.495 S209.1
NetD210_1: D210.1 S210.1 | length 8.9
  Component Side w0.254: D210.1 -185.816,90.495 S210.1
NetD211_1: D211.1 S211.1 | length 8.9
  Component Side w0.254: D211.1 -204.866,90.495 S211.1
NetD212_1: D212.1 S212.1 | length 8.9
  Component Side w0.254: D212.1 -223.916,90.495 S212.1
NetD213_1: D213.1 S213.1 | length 8.8
  Component Side w0.254: D213.1 -242.839,90.495 S213.1
NetD214_1: D214.1 S214.1 | length 8.1
  Component Side w0.254: D214.1 -261.127,90.495 S214.1
NetD215_1: D215.1 S215.1 | length 8.9
  Component Side w0.254: D215.1 -19.065,71.445 S215.1
NetD216_1: D216.1 S216.1 | length 9.1
  Component Side w0.254: D216.1 -43.068,71.445 S216.1
NetD217_1: D217.1 S217.1 | length 8.8
  Component Side w0.254: D217.1 -61.864,71.445 S217.1
NetD218_1: D218.1 S218.1 | length 8.8
  Component Side w0.254: D218.1 -80.914,71.445 S218.1
NetD219_1: D219.1 S219.1 | length 8.9
  Component Side w0.254: D219.1 -100.091,71.445 S219.1
NetD220_1: D220.1 S220.1 | length 9.7
  Component Side w0.254: D220.1 -119.141,71.445 S220.1 S220.1@-116.967,70.943
NetD221_1: D221.1 S221.1 | length 8.9
  Component Side w0.254: D221.1 -138.191,71.445 S221.1
NetD222_1: D222.1 S222.1 | length 8.8
  Component Side w0.254: D222.1 -157.114,71.445 S222.1
NetD223_1: D223.1 S223.1 | length 8.8
  Component Side w0.254: D223.1 -176.164,71.445 S223.1
NetD224_1: D224.1 S224.1 | length 8.8
  Component Side w0.254: D224.1 -195.214,71.445 S224.1
NetD225_1: D225.1 S225.1 | length 8.7
  Component Side w0.254: D225.1 -214.137,71.445 S225.1
NetD226_1: D226.1 S226.1 | length 8.8
  Component Side w0.254: D226.1 -233.314,71.445 S226.1
NetD227_1: D227.1 S227.1 | length 10.4
  Component Side w0.254: D227.1 -253.253,71.445 S227.1 S227.1@-250.317,70.943
NetD228_1: D228.1 S228.1 | length 8.5
  Component Side w0.254: S228.1 -261.478,68.905 D228.1
NetD229_1: D229.1 S229.1 | length 13.9
  Component Side w0.254: D229.1 -18.938,49.855 S229.1
NetD230_1: D230.1 S230.1 | length 8.6
  Component Side w0.254: D230.1 -47.386,52.395 S230.1
NetD231_1: D231.1 S231.1 | length 8.8
  Component Side w0.254: D231.1 -66.563,52.395 S231.1
NetD232_1: D232.1 S232.1 | length 8.9
  Component Side w0.254: D232.1 -85.74,52.395 S232.1
NetD233_1: D233.1 S233.1 | length 8.9
  Component Side w0.254: D233.1 -104.79,52.395 S233.1
NetD234_1: D234.1 S234.1 | length 9.9
  Component Side w0.254: D234.1 -124.094,52.395 S234.1
  Bottom Layer w0.254: S234.1@-121.793,51.83 S234.1
NetD235_1: D235.1 S235.1 | length 8.9
  Component Side w0.254: D235.1 -142.89,52.395 S235.1
NetD236_1: D236.1 S236.1 | length 8.8
  Component Side w0.254: D236.1 -161.813,52.395 S236.1
NetD237_1: D237.1 S237.1 | length 8.8
  Component Side w0.254: D237.1 -180.863,52.395 S237.1
NetD238_1: D238.1 S238.1 | length 8.9
  Component Side w0.254: D238.1 -200.04,52.395 S238.1
NetD239_1: D239.1 S239.1 | length 8.8
  Component Side w0.254: D239.1 -218.963,52.395 S239.1
NetD240_1: D240.1 S240.1 | length 8.9
  Component Side w0.254: D240.1 -238.14,52.395 S240.1
NetD242_1: D242.1 S242.1 | length 14.3
  Component Side w0.254: S242.1 -258.43,52.395 D242.1
NetD243_1: D243.1 S243.1 | length 15.2
  Component Side w0.254: D243.1 -29.733,30.805 S243.1
NetD245_1: D245.1 S245.1 | length 9.8
  Component Side w0.254: D245.1 -61.468,30.765 -58.888,33.345 S245.1
NetD246_1: D246.1 S246.1 | length 9.9
  Component Side w0.254: D246.1 -76.215,33.345 S246.1 S246.1@-74.295,32.652
NetD247_1: D247.1 S247.1 | length 8.8
  Component Side w0.254: D247.1 -95.138,33.345 S247.1
NetD248_1: D248.1 S248.1 | length 8.9
  Component Side w0.254: D248.1 -114.315,33.345 S248.1
NetD249_1: D249.1 S249.1 | length 8.8
  Component Side w0.254: D249.1 -133.238,33.345 S249.1
NetD250_1: D250.1 S250.1 | length 8.9
  Component Side w0.254: D250.1 -152.415,33.345 S250.1
NetD251_1: D251.1 S251.1 | length 8.9
  Component Side w0.254: D251.1 -171.465,33.345 S251.1
NetD252_1: D252.1 S252.1 | length 8.9
  Component Side w0.254: D252.1 -190.515,33.345 S252.1
NetD253_1: D253.1 S253.1 | length 8.9
  Component Side w0.254: D253.1 -209.565,33.345 S253.1
NetD254_1: D254.1 S254.1 | length 8.8
  Component Side w0.254: D254.1 -228.488,33.345 S254.1
NetD256_1: D256.1 S256.1 | length 16.7
  Component Side w0.254: D256.1 -259.857,30.805 S256.1
NetD257_1: D257.1 S257.1 | length 15.3
  Component Side w0.254: D257.1 -22.748,11.755 S257.1
NetD258_1: D258.1 S258.1 | length 8.3
  Component Side w0.254: S258.1 -28.306,11.755 D258.1
NetD259_1: D259.1 S259.1 | length 6.6
  Component Side w0.254: S259.1 -269.098,87.955 D259.1
  Bottom Layer w0.254: S259.1 S259.1@-271.349,88.646
NetD260_1: D260.1 S260.1 | length 13.9
  Component Side w0.254: D260.1 -68.976,11.755 S260.1
NetD262_1: D262.1 S262.1 | length 14.2
  Component Side w0.254: D262.1 -150.256,11.755 S262.1
NetD264_1: D264.1 S264.1 | length 8.5
  Component Side w0.254: S264.1 -237.602,11.755 D264.1
NetD265_1: D265.1 S265.1 | length 15.1
  Component Side w0.254: D265.1 -232.044,11.755 S265.1
NetD266_1: D266.1 S266.1 | length 6.7
  Component Side w0.254: S266.1 -263.256,11.755 D266.1
NetD269_1: D269.1 S269.1 | length 9.3
  Component Side w0.254: S269.1 -265.415,30.805 D269.1
NetR302_1: R302.1 U301.13 | length 2
  Component Side w0.254: R302.1 -29.306,56.023 U301.13
PC2: D215.2 D216.2 D217.2 D218.2 D219.2 D220.2 D221.2 D222.2 D223.2 D224.2 D225.2 D226.2 D227.2 D228.2 U301.5 | length 289.7
  Component Side w0.254: D228.2 D227.2 -254.96,62.992 -240.467,62.992 ; D226.2 -240.467,62.992 ; D225.2 -221.29,62.992 ; D224.2 -202.367,62.992 ; D223.2 -183.317,62.992 ; D222.2 -164.267,62.992 ; D221.2 -145.344,62.992 ; D220.2 -126.294,62.992 ; D219.2 -107.244,62.992 ; D218.2 -88.067,62.992 ; D217.2 -69.017,62.992 ; D216.2 -50.221,62.992 ; U301.5 -25.129,59.666 -26.096,60.633 -29.391,60.633 -31.75,62.992 ; D215.2 -29.027,65.715 -31.75,62.992 ; -240.467,62.992 -221.29,62.992 ; -221.29,62.992 -202.367,62.992 ; -202.367,62.992 -183.317,62.992 ; -183.317,62.992 -164.267,62.992 ; -164.267,62.992 -145.344,62.992 ; -145.344,62.992 -126.294,62.992 ; -126.294,62.992 -107.244,62.992 ; -107.244,62.992 -88.067,62.992 ; -88.067,62.992 -69.017,62.992 ; -69.017,62.992 -50.221,62.992 ; -50.221,62.992 -31.75,62.992
PC5: D229.2 D230.2 D231.2 D232.2 D233.2 D234.2 D235.2 D236.2 D237.2 D238.2 D239.2 D240.2 D242.2 U301.25 | length 282.7
  Component Side w0.254: D242.2 -251.658,44.323 -244.912,44.323 ; D240.2 -244.912,44.323 ; D239.2 -225.735,44.323 ; D238.2 -206.812,44.323 ; D237.2 -187.635,44.323 ; D236.2 -168.585,44.323 ; D235.2 -149.662,44.323 ; D234.2 -130.866,44.323 ; D233.2 -111.562,44.323 ; D232.2 -92.512,44.323 ; D231.2 -73.335,44.323 ; D230.2 -54.158,44.323 ; U301.25 -21.503,54.523 -19.939,52.959 -19.939,50.927 -21.971,48.895 -21.971,47.244 -21.392,46.665 D229.2 -23.17,44.323 -54.158,44.323 ; -244.912,44.323 -225.735,44.323 ; -225.735,44.323 -206.812,44.323 ; -206.812,44.323 -187.635,44.323 ; -187.635,44.323 -168.585,44.323 ; -168.585,44.323 -149.662,44.323 ; -149.662,44.323 -130.866,44.323 ; -130.866,44.323 -111.562,44.323 ; -111.562,44.323 -92.512,44.323 ; -92.512,44.323 -73.335,44.323 ; -73.335,44.323 -54.158,44.323
PD0: D201.2 D202.2 D203.2 D204.2 D205.2 D206.2 D207.2 D208.2 D209.2 D210.2 D211.2 D212.2 D213.2 D214.2 D259.2 U301.6 | length 547.6
  Component Side w0.254: D213.2 -249.865,82.169 ; D212.2 -230.942,82.169 ; D211.2 -211.892,82.169 ; D210.2 -192.842,82.169 ; D209.2 -173.665,82.169 ; D208.2 -154.615,82.169 ; D207.2 -135.692,82.169 ; D206.2 -116.515,82.169 ; D205.2 -97.465,82.169 ; D204.2 -78.415,82.169 ; D203.2 -59.492,82.169 ; D202.2 D201.2 -41.077,82.169 -59.492,82.169 ; U301.6 -25.629,59.524 -26.284,60.179 -29.579,60.179 -31.938,62.538 -272.596,62.538 -273.812,63.754 -273.812,68.961 -267.081,75.692 -267.081,84.638 D259.2 D214.2 -262.961,82.169 -249.865,82.169 ; -249.865,82.169 -230.942,82.169 ; -230.942,82.169 -211.892,82.169 ; -211.892,82.169 -192.842,82.169 ; -192.842,82.169 -173.665,82.169 ; -173.665,82.169 -154.615,82.169 ; -154.615,82.169 -135.692,82.169 ; -135.692,82.169 -116.515,82.169 ; -116.515,82.169 -97.465,82.169 ; -97.465,82.169 -78.415,82.169 ; -78.415,82.169 -59.492,82.169
PD2: D257.2 D258.2 D260.2 D262.2 D264.2 D265.2 D266.2 U301.8 | length 564.5
  Component Side w0.254: D266.2 -258.77,5.969 -254.762,5.969 ; D265.2 D264.2 -238.308,5.969 ; D262.2 -154.742,5.969 ; D260.2 -73.462,5.969 ; U301.8 -27.227,59.271 -29.955,59.271 -32.314,61.63 -263.243,61.63 -272.996,51.877 -272.996,36.122 -279.4,29.718 -279.4,26.416 -275.209,22.225 -271.018,22.225 -254.762,5.969 ; D257.2 D258.2 -29.012,5.969 -73.462,5.969 ; -254.762,5.969 -238.308,5.969 ; -238.308,5.969 -154.742,5.969 ; -154.742,5.969 -73.462,5.969
PD4: D243.2 D245.2 D246.2 D247.2 D248.2 D249.2 D250.2 D251.2 D252.2 D253.2 D254.2 D256.2 D269.2 U301.10 | length 570.7
  Component Side w0.254: D269.2 D256.2 -259.278,25.146 -235.966,25.146 ; D254.2 -235.387,25.146 ; D253.2 -216.464,25.146 ; D252.2 -197.414,25.146 ; D251.2 -178.364,25.146 ; D250.2 -159.314,25.146 ; D249.2 -140.137,25.146 ; D248.2 -121.214,25.146 ; D247.2 -102.037,25.146 ; D246.2 -83.114,25.146 ; D245.2 -63.937,25.146 ; D243.2 -34.092,25.146 -63.937,25.146 ; U301.10 -27.932,57.523 -28.772,58.363 -30.331,58.363 -32.69,60.722 -262.867,60.722 -272.088,51.501 -272.088,43.241 -264.915,36.068 -246.888,36.068 -235.966,25.146 ; -235.966,25.146 -235.387,25.146 ; -235.387,25.146 -216.464,25.146 ; -216.464,25.146 -197.414,25.146 ; -197.414,25.146 -178.364,25.146 ; -178.364,25.146 -159.314,25.146 ; -159.314,25.146 -140.137,25.146 ; -140.137,25.146 -121.214,25.146 ; -121.214,25.146 -102.037,25.146 ; -102.037,25.146 -83.114,25.146 ; -83.114,25.146 -63.937,25.146
RAW: CON302.vbus CON304.1 D301.4 F301.2 | length 31.6
  Component Side w0.254: D301.4 -21.02,85.173 -21.02,86.83 -19.85,88 CON302.vbus -20.701,88.901 -20.701,89.789 -20.413,90.077 -15.401,90.077 -11.938,86.614 CON304.1 -9.683,82.122 F301.2
RST: R301.2 S302.2 U301.24 | length 129.1
  Component Side w0.254: v1(-25.654,48.514) -25.781,48.514 -25.717,48.578 R301.2 -23.129,52.466 U301.24
  Bottom Layer w0.254: S302.2@-109.817,6.965 -109.746,6.894 -32.222,6.894 -29.845,9.271 -29.845,44.323 v1(-25.654,48.514)
VCC: C302.2 C303.2 C304.2 F301.1 R301.1 U301.4 U301.31 U301.32 | length 89.4
  Component Side w0.254: v1(-30.226,62.865) -29.449,62.088 C302.2 -28.082,61.087 -25.908,61.087 -24.629,59.808 U301.4 ; U301.31 -21.471,57.523 -20.971,58.023 ; U301.32 -20.971,58.023 ; v1(-22.098,50.419) -21.179,51.338 R301.1 ; v1(-20.193,60.579) -20.589,60.183 C303.2 -20.589,58.405 -20.971,58.023 ; v1(-17.018,53.721) -16.383,53.721 -14.732,55.372 -7.493,55.372 -1.905,60.96 -1.905,77.39 C304.2 F301.1
  Bottom Layer w0.254: v1(-30.226,62.865) -30.226,58.547 v1(-22.098,50.419) -19.685,50.419 -17.018,53.086 v1(-17.018,53.721) -19.558,53.721 -21.844,56.007 -21.844,58.928 v1(-20.193,60.579)
pads on no net: CON302.id S201. S202. S203. S204. S205. S206. S207. S208. S209. S210. S211. S212. S213. S214. S215. S216. S217. S218. S219. S220. S221. S222. S223. S224. S225. S226. S227. S228. S229. S230. S231. S232. S233. S234. S235. S236. S237. S238. S239. S240. S242. S243. S245. S246. S247. S248. S249. S250. S251. S252. S253. S254. S256. S257. S258. S259. S260. S262. S264. S265. S266. S269. S302.

## Polygon pours and split planes (outlines as drawn)
GND on Bottom Layer "Component Side-No Net" (solid, pour order 0): -0.635,93.995 -0.635,0.65 -283.972,0.65 -283.972,93.995
GND on Component Side "Component Side-No Net" (solid, pour order 2): -0.635,93.995 -0.635,0.65 -283.972,0.65 -283.972,93.995

## Other copper
Component Side:
  pour cut-out: -280.49,-2.44 ccw(c-280.49,-0.94) -280.49,0.561 cw(c-280.49,4.06) -283.99,4.06 ccw(c-285.49,4.06) -285.49,5.561 ccw(c-285.49,4.06) -286.991,4.06 ccw(c-280.49,4.06)
  pour cut-out: -287.043,90.504 ccw(c-285.543,90.504) -284.043,90.504 cw(c-280.543,90.504) -280.543,94.004 ccw(c-280.543,95.504) -279.043,95.504 ccw(c-280.543,95.504) -280.543,97.004 ccw(c-280.543,90.504)
  pour cut-out: 2.44,4.117 ccw(c0.94,4.117) -0.561,4.117 cw(c-4.06,4.117) -4.06,0.617 ccw(c-4.06,-0.883) -5.561,-0.883 ccw(c-4.06,-0.883) -4.06,-2.384 ccw(c-4.06,4.117)
  pour cut-out: -4.117,97.055 ccw(c-4.117,95.555) -4.117,94.054 cw(c-4.117,90.555) -0.617,90.555 ccw(c0.883,90.555) 0.883,89.054 ccw(c0.883,90.555) 2.384,90.555 ccw(c-4.117,90.555)
Bottom Layer:
  pour cut-out: -280.49,-2.44 ccw(c-280.49,-0.94) -280.49,0.561 cw(c-280.49,4.06) -283.99,4.06 ccw(c-285.49,4.06) -285.49,5.561 ccw(c-285.49,4.06) -286.991,4.06 ccw(c-280.49,4.06)
  pour cut-out: -4.117,97.055 ccw(c-4.117,95.555) -4.117,94.054 cw(c-4.117,90.555) -0.617,90.555 ccw(c0.883,90.555) 0.883,89.054 ccw(c0.883,90.555) 2.384,90.555 ccw(c-4.117,90.555)
  pour cut-out: 2.44,4.117 ccw(c0.94,4.117) -0.561,4.117 cw(c-4.06,4.117) -4.06,0.617 ccw(c-4.06,-0.883) -5.561,-0.883 ccw(c-4.06,-0.883) -4.06,-2.384 ccw(c-4.06,4.117)
  pour cut-out: -287.043,90.504 ccw(c-285.543,90.504) -284.043,90.504 cw(c-280.543,90.504) -280.543,94.004 ccw(c-280.543,95.504) -279.043,95.504 ccw(c-280.543,95.504) -280.543,97.004 ccw(c-280.543,90.504)

## Silkscreen, mask and mechanical layers (free items; w line width, h text height)
Top Overlay:
  text "PURE60" at -125.222,9.398 h8
Top Solder:
  text "by 4pplet" at -115.824,6.858 h3
  text "RevA1" at -125.095,6.731 h3
outline:
  lines w0.203: -195.49,94.615 -195.484,94.608 ; -119.294,94.604 -119.29,94.608
  lines w0.254: -282,0.01 cw(c-282,3.01) -285,3.01 -285,91.615 cw(c-282,91.615) -282,94.615 -195.49,94.615 ; -282,0.015 -3,0.015 ; -198.628,94.615 -119.294,94.615 ; -124.46,94.615 -3,94.615 cw(c-3,91.615) 0,91.615 0,3.01 cw(c-3,3.01) -3,0.01